# Altium PCB mini_bot_v1.PcbDoc
Units mil, origin at the board's own origin, x right, y up, seen from the top; angles counter-clockwise.
Board outline 6000 x 4000 mil, 4 copper layers (Top Layer 1, Layer 1, Layer 2, Bottom Layer 1), stack 23.756 mil thick; 41 components, 45 nets, 209 pads, 0 vias.
Unrouted connection lines stored in the file: 82.
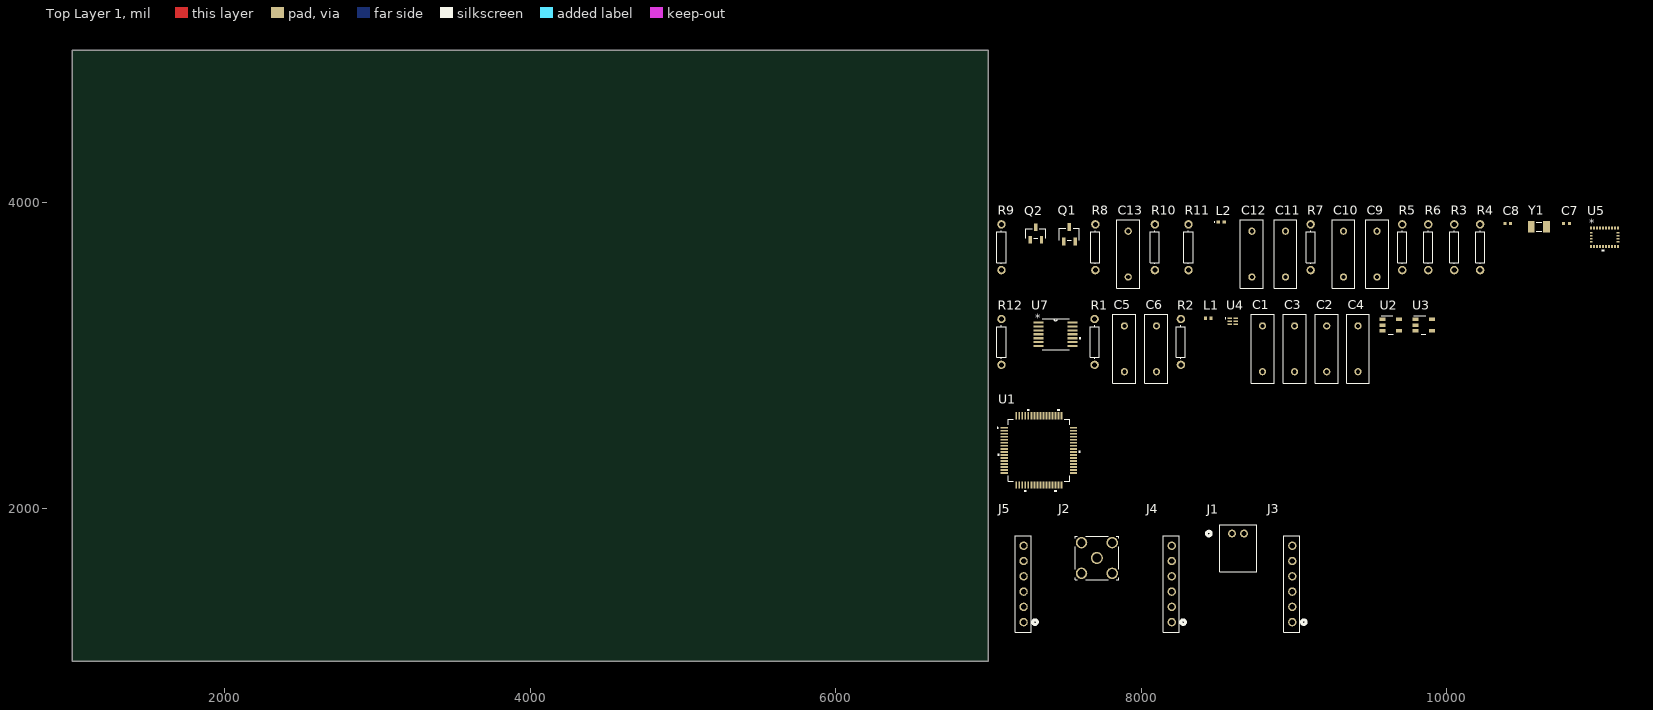
[diagram p0: Top Layer 1 view]
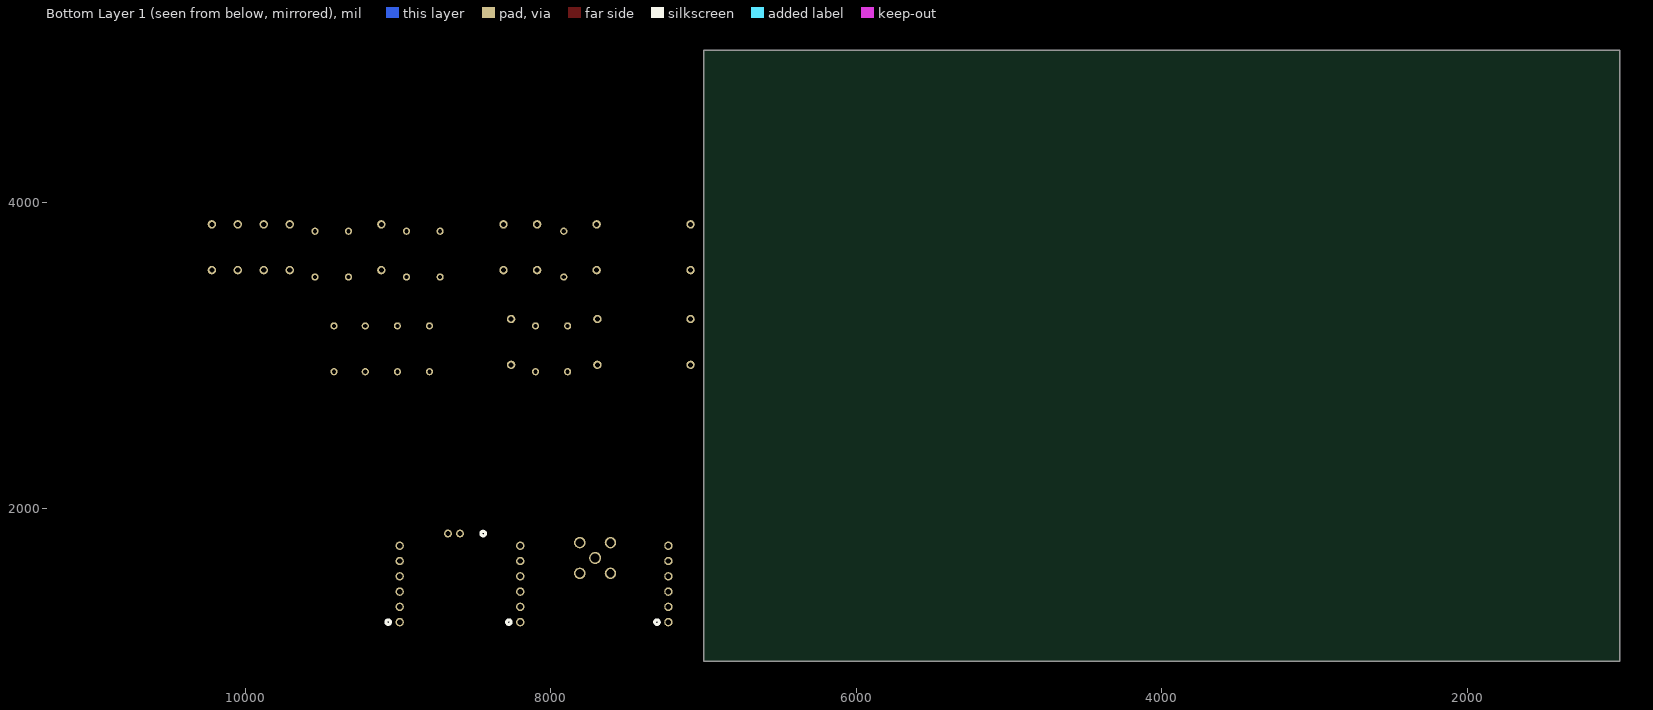
[diagram p1: Bottom Layer 1 view, seen from below]
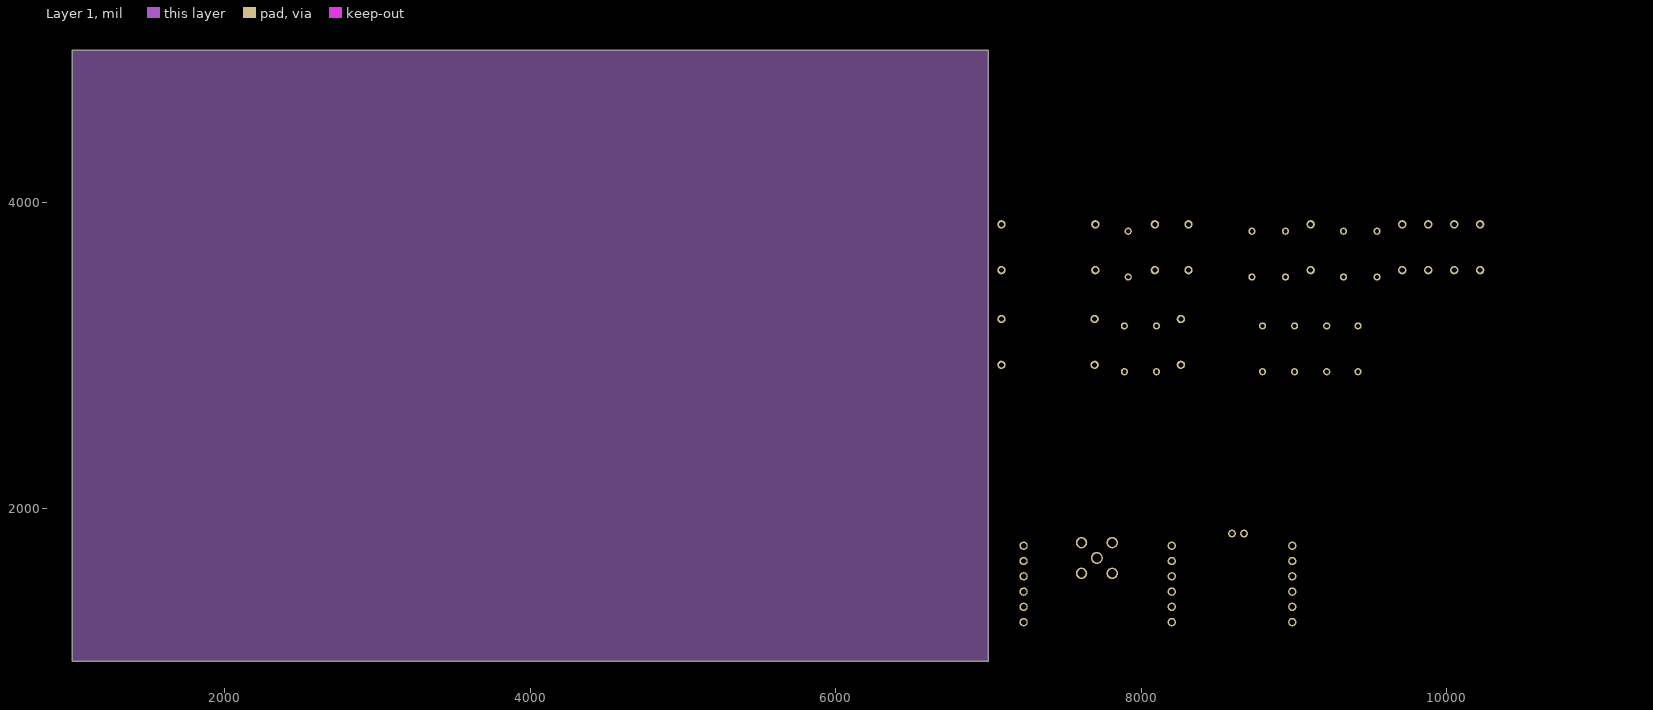
[diagram p2: Layer 1]
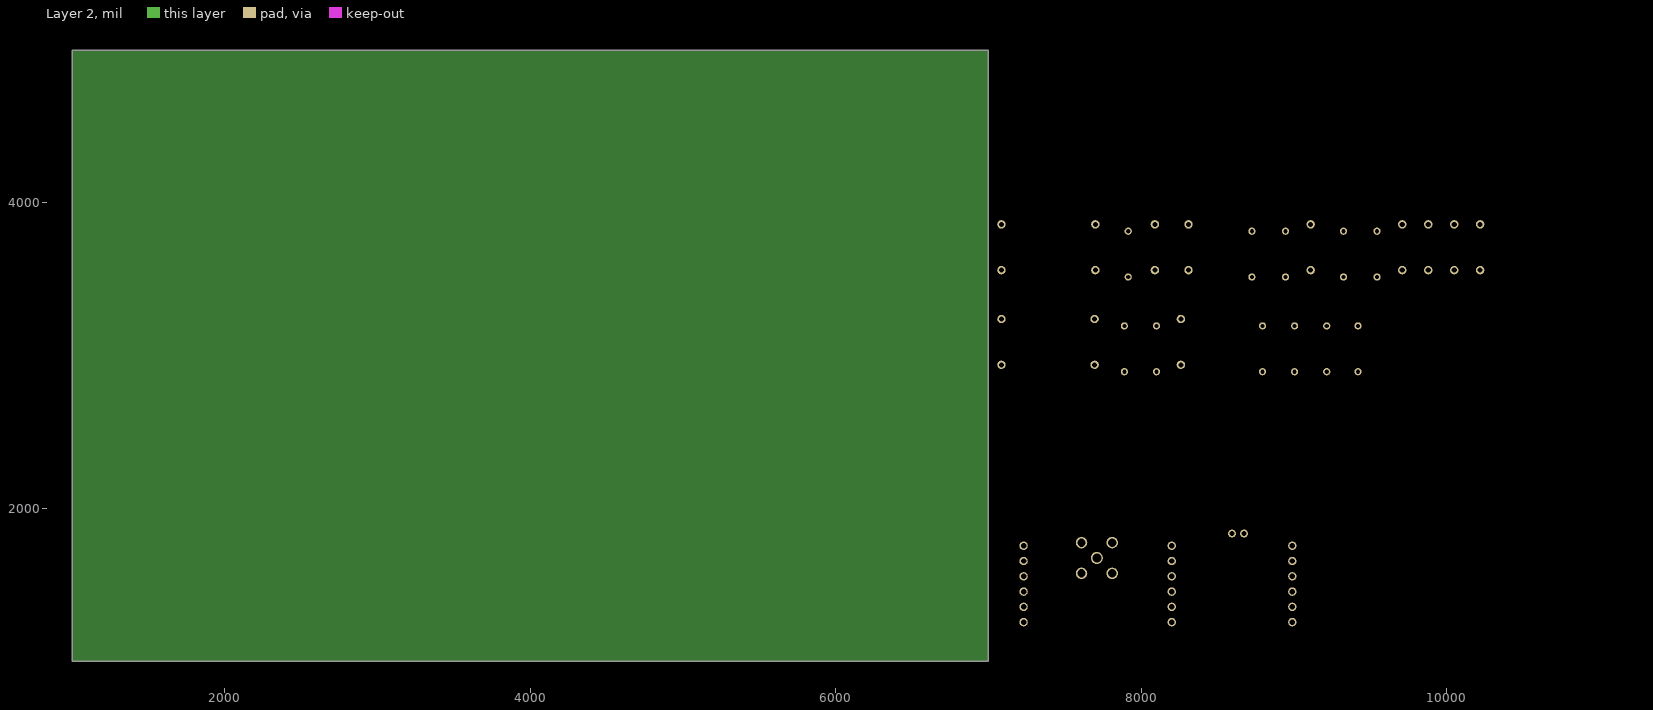
[diagram p3: Layer 2]

## Layer stack, top to bottom
Top Solder: solder mask 0.4, Solder Resist, Dk 3.5
Top Layer 1: signal copper 1.378
Dielectric 2: prepreg 2.8, PP-006, Dk 4.1
Layer 1: signal copper 1.4
Dielectric 1: dielectric 12.6, FR-4, Dk 4.8
Layer 2: signal copper 1.4
Dielectric 3: prepreg 2.8, PP-006, Dk 4.1
Bottom Layer 1: signal copper 1.378
Bottom Solder: solder mask 0.4, Solder Resist, Dk 3.5

## Board outline
1000,1000 7000,1000 7000,5000 1000,5000

## Design rules (kind name [scope] priority, off if disabled: settings)
Clearance [All] p1: gap=10 ignorepadtopadclearanceinfootprint=FALSE except(0: Arc-Hole Track-Hole SMDPad-Hole THPad-Hole Via-Hole Fill-Hole Poly-Hole Region-Hole Text-Hole)
PolygonConnect [All] p1: connectstyle=Relief reliefconductorwidth=10 reliefentries=4 polygonreliefangle="90 Angle" airgapwidth=10
RoomDefinition Sensor [InComponentClass('Sensor')] p1: confinementstyle=ConfineIn formatcopy=TRUE lockcomponents=FALSE outline 7045,3430 11165,3430 11165,4000 7045,4000
RoomDefinition Power [InComponentClass('Power')] p2: confinementstyle=ConfineIn formatcopy=TRUE lockcomponents=FALSE outline 7045,2810 9940,2810 9940,3380 7045,3380
RoomDefinition microController [InComponentClass('microController')] p3: confinementstyle=ConfineIn formatcopy=TRUE lockcomponents=FALSE outline 7045,2100 7610,2100 7610,2760 7045,2760
RoomDefinition Connectors [InComponentClass('Connectors')] p4: confinementstyle=ConfineIn formatcopy=TRUE lockcomponents=FALSE outline 7045,1065 9165,1065 9165,2045 7045,2045
RoutingVias [All] p1: holewidth=28 width=50 viastyle="Through Hole" minholewidth=28 minwidth=50 maxholewidth=28 maxwidth=50
SolderMaskExpansion [All] p1: expansion=4 istentingtop=FALSE
Width [All] p1: maxlimit=10 minlimit=10 preferedwidth=10
30 further rules are at their usual default settings.

## Classes and differential pairs
component class Sensor: U6

## Components (designator, comment, footprint, x,y, rotation, side; value= is the part's Value field where it differs from the comment)
C1 "Cap" RAD-0.3 8795,3045 r90 top value=100pF
C2 "Cap" RAD-0.3 9215,3045 r90 top value=100pF
C3 "Cap" RAD-0.3 9005,3045 r90 top value=100pF
C4 "Cap" RAD-0.3 9420,3045 r90 top value=100pF
C5 "Cap" RAD-0.3 7890,3045 r90 top value=100pF
C6 "Cap" RAD-0.3 8100,3045 r90 top value=100pF
C7 "CBR04C220F5GAC" CAPC10555_55N_KEM 10785,3865 r0 top
C8 "CBR04C220F5GAC" CAPC10555_55N_KEM 10400,3865 r0 top
C9 "Cap" RAD-0.3 9545,3665 r90 top value=100pF
C10 "Cap" RAD-0.3 9325,3665 r90 top value=100pF
C11 "Cap" RAD-0.3 8945,3665 r90 top value=100pF
C12 "Cap" RAD-0.3 8725,3665 r90 top value=27pF
C13 "Cap" RAD-0.3 7915,3665 r90 top value=25pF
J1 "S2B-PH-K-S(LF)(SN)" CONN_S2B-PH-K-S_JST 8595,1835 r0 top
J2 "RF2-04A-T-00-50-G" CONN_RF2-04A-T-00-50-G_ADM 7710,1675 r0 top
J3 "TSW-106-14-F-S" CON6_1X6_TU_TSW 8990,1505 r90 top
J4 "TSW-106-14-F-S" CON6_1X6_TU_TSW 8200,1505 r90 top
J5 "TSW-106-14-F-S" CON6_1X6_TU_TSW 7230,1505 r90 top
L1 "1239AS-H-1R0M=P2" CAPC10555_55N_KEM 8440,3245 r0 top
L2 "Inductor" 0402-A 8525,3875 r0 top value=35.5nH
Q1 "AO3407A" SOT-23-3L_AOS 7530,3795 r0 top
Q2 "MMBT3904LT1G" SOT-23_3L_ONS 7310,3800 r0 top
R1 "Res1" AXIAL-0.3 7695,3090 r90 top value=1K
R2 "Res1" AXIAL-0.3 8260,3090 r90 top value=1K
R3 "Res1" AXIAL-0.3 10050,3710 r90 top value=1K
R4 "Res1" AXIAL-0.3 10220,3710 r90 top value=1K
R5 "Res1" AXIAL-0.3 9710,3710 r90 top value=1K
R6 "Res1" AXIAL-0.3 9880,3710 r90 top value=1K
R7 "Res1" AXIAL-0.3 9110,3710 r90 top value=1K
R8 "Res1" AXIAL-0.3 7700,3710 r90 top value=2K
R9 "Res1" AXIAL-0.3 7085,3710 r90 top value=2.4K
R10 "Res1" AXIAL-0.3 8090,3710 r90 top value=1M
R11 "Res1" AXIAL-0.3 8310,3710 r90 top value=1M
R12 "Res1" AXIAL-0.3 7085,3090 r90 top value=1K
U1 "STM32F446RCT6TR" LQFP64-10x10mm 7330,2380 r0 top
U2 "LP2981-33DBVR" DBV0005A_N 9635,3200 r0 top
U3 "LP2981-33DBVR" DBV0005A_N 9850,3200 r0 top
U4 "MP2148GQD-33-Z" QFN-1p0x1p5_MNP 8600,3225 r0 top
U5 "BNO055" QFN_BNO055_BOS 11035,3775 r0 top
U7 "TXB0104PWR" PW14 7440,3140 r0 top
Y1 "ECS-.327-12.5-34B-C-TR" XTAL_ECS-.327-12.5-34B-C-TR 10605,3845 r0 top

## Footprints (in the part's own frame and the unit in brackets; to place one, negate y for a bottom-side part, rotate by r counter-clockwise, add the part's x,y. Pads: shape width x height; smd on the part's side, far side on the other; paste and mask are expansions set on the pad)
0402-A [mm] "Chip Inductor, Body 1.0x0.5mm, IPC High Density"
  rect 0.6x0.5 smd: 1(-0.5,0) 2(0.5,0)
  silkscreen extent -1.1,-0.15 -1.1,0.15, body extent -0.55,-0.3 0.55,0.3, height 0.55
AXIAL-0.3 [mm] "Axial Device, Thru-Hole; 2 Leads; 0.3 in Pin Spacing"
  round 1.4 hole 0.85: 1(-3.81,0) 2(3.81,0)
  silkscreen extent -2.77,-0.76 2.77,0.76
CAPC10555_55N_KEM [mm]
  rect 0.503x0.55 smd paste+0 mask+0: 1(-0.477,0) 2(0.477,0)
  body extent -0.53,-0.28 0.53,0.28, height 0.55
CON6_1X6_TU_TSW [mil]
  round 55 hole 35 mask+0: 1(-250,0) 2(-150,0) 3(-50,0) 4(50,0) 5(150,0) 6(250,0)
  silkscreen extent -315,-90 315,55, body extent -300,-50 300,50, height 500
CONN_RF2-04A-T-00-50-G_ADM [mil]
  round 79 hole 59: 1(0,0)
  round 75 hole 55 mask+0: 2(-100.5,100.5) 3(-100.5,-100.5) 4(100.5,-100.5) 5(100.5,100.5)
  silkscreen extent -143,-143 143,143, body extent 0,0 10,10, height 10
CONN_S2B-PH-K-S_JST [mil]
  round 52 hole 32 mask+0: 1(0,0) 2(78.74,0)
  silkscreen extent -167,-251 160,58, body extent 0,0 10,10, height 10
DBV0005A_N [mm]
  rect 1x0.6 smd paste+0 mask+0.051: 1(-1.375,0.95) 2(-1.375,0) 3(-1.375,-0.95) 4(1.375,-0.95) 5(1.375,0.95)
  silkscreen extent -1.63,-1.55 0.38,1.55, body extent 0,0 0.25,0.25, height 0.25
LQFP64-10x10mm [mil]
  rect 47x12 smd paste+0 mask+0: 1(-226.38,147.64) 2(-226.38,127.95) 3(-226.38,108.27) 4(-226.38,88.58) 5(-226.38,68.9) 6(-226.38,49.21) 7(-226.38,29.53) 8(-226.38,9.84) 9(-226.38,-9.84) 10(-226.38,-29.53) 11(-226.38,-49.21) 12(-226.38,-68.9) 13(-226.38,-88.58) 14(-226.38,-108.27) 15(-226.38,-127.95) 16(-226.38,-147.64) 33(226.38,-147.64) 34(226.38,-127.95) 35(226.38,-108.27) 36(226.38,-88.58) 37(226.38,-68.9) 38(226.38,-49.21) 39(226.38,-29.53) 40(226.38,-9.84) 41(226.38,9.84) 42(226.38,29.53) 43(226.38,49.21) 44(226.38,68.9) 45(226.38,88.58) 46(226.38,108.27) 47(226.38,127.95) 48(226.38,147.64)
  rect 12x47 smd paste+0 mask+0: 17(-147.64,-226.38) 18(-127.95,-226.38) 19(-108.27,-226.38) 20(-88.58,-226.38) 21(-68.9,-226.38) 22(-49.21,-226.38) 23(-29.53,-226.38) 24(-9.84,-226.38) 25(9.84,-226.38) 26(29.53,-226.38) 27(49.21,-226.38) 28(68.9,-226.38) 29(88.58,-226.38) 30(108.27,-226.38) 31(127.95,-226.38) 32(147.64,-226.38) 49(147.64,226.38) 50(127.95,226.38) 51(108.27,226.38) 52(88.58,226.38) 53(68.9,226.38) 54(49.21,226.38) 55(29.53,226.38) 56(9.84,226.38) 57(-9.84,226.38) 58(-29.53,226.38) 59(-49.21,226.38) 60(-68.9,226.38) 61(-88.58,226.38) 62(-108.27,226.38) 63(-127.95,226.38) 64(-147.64,226.38)
  silkscreen extent -273,-270 270,270, body extent -236,-236 236,236, height 63
PW14 [mil]
  rect 66x14 smd: 1(-111,76.77) 2(-111,51.18) 3(-111,25.59) 4(-111,0) 5(-111,-25.59) 6(-111,-51.18) 7(-111,-76.77) 8(111,-76.77) 9(111,-51.18) 10(111,-25.59) 11(111,0) 12(111,25.59) 13(111,51.18) 14(111,76.77)
  silkscreen extent -88,-100 164,100, body extent -130,-101 130,101, height 47
QFN-1p0x1p5_MNP [mil]
  rect 28x10 smd paste-5 mask+0: 1(-19.5,19.68) 2(-19.5,0) 3(-19.5,-19.68) 4(19.5,-19.68) 5(19.5,0) 6(19.5,19.68)
  silkscreen extent -50,17 -47,23, body extent -21,-31 21,31, height 37
QFN_BNO055_BOS [mil]
  rect 12x21 smd paste+0 mask+0: 1(-88.58,60.5) 6(-88.58,-60.5) 7(-68.9,-60.5) 8(-49.21,-60.5) 9(-29.53,-60.5) 10(-9.84,-60.5) 11(9.84,-60.5) 12(29.53,-60.5) 13(49.21,-60.5) 14(68.9,-60.5) 15(88.58,-60.5) 20(88.58,60.5) 21(68.9,60.5) 22(49.21,60.5) 23(29.53,60.5) 24(9.84,60.5) 25(-9.84,60.5) 26(-29.53,60.5) 27(-49.21,60.5) 28(-68.9,60.5)
  rect 17x12 smd: 2(-88,29.53) 3(-88,9.84) 4(-88,-9.84) 5(-88,-29.53) 16(88,-29.53) 17(88,-9.84) 18(88,9.84) 19(88,29.53)
  silkscreen extent -17,-91 -2,-81, body extent 0,0 10,10, height 10
RAD-0.3 [mm] "Radial Cap, Thru-Hole; 2 Leads; 0.3 in Pin Spacing"
  round 1.2 hole 0.7: 1(-3.81,0) 2(3.81,0)
  silkscreen extent -5.71,-1.91 5.71,1.91
SOT-23-3L_AOS [mil]
  rect 22x52 smd paste+0 mask+0: 1(-37.5,-47) 2(37.5,-47) 3(0,47)
  silkscreen extent -66,-40 66,40, body extent -61,-59 61,59, height 49
SOT-23_3L_ONS [mil]
  rect 22x50 smd paste+0 mask+0: 1(-37.5,-41) 2(37.5,-41) 3(0,41)
  silkscreen extent -65,-32 65,32, body extent -60,-52 60,52, height 44
XTAL_ECS-.327-12.5-34B-C-TR [mm]
  rect 1.1x1.9 smd: 1(-1.25,0) 2(1.25,0)
  silkscreen extent -0.44,-0.75 0.44,0.75

## Part data
C1 C2 C3 C4 C5 C6 C9 C10 C11 C12 C13: "Capacitor", LatestRevisionDate=17-Jul-2002, LatestRevisionNote="Re-released for DXP Platform.", PackageDescription="Radial Cap, Thru-Hole; 2 Leads; 0.3 in Pin Spacing", PackageReference=RAD-0.3, Published=8-Jun-2000, Publisher="Altium Limited"
C7 C8: "No Description Available", Mfr_Name=Kemet, Copyright="Copyright (C) 2023 Ultra Librarian. All rights reserved.", Digi-Key_Part_Number_1=399-8827-1-ND, Digi-Key_Part_Number_2=399-8827-2-ND, Digi-Key_Part_Number_3=399-8827-6-ND, Manufacturer_Part_Number=CBR04C220F5GAC, RefDes=RefDes, Type=DEV
J1: "No Description Available", Mfr_Name=JST, Copyright="Copyright (C) 2023 Ultra Librarian. All rights reserved.", Digi-Key_Part_Number_1=455-1719-ND, Digi-Key_Part_Number_2=455-1719-NDL, Manufacturer_Part_Number=S2B-PH-K-S(LF)(SN), RefDes=RefDes, Type=DEV
J2: "No Description Available", Mfr_Name="ADAM TECHNOLOGIES INC", Copyright="Copyright (C) 2023 Ultra Librarian. All rights reserved.", Digi-Key_Part_Number_1=2057-RF2-04A-T-00-50-G-ND, Manufacturer_Part_Number=RF2-04A-T-00-50-G, RefDes=RefDes, Type=DEV
J3 J4 J5: "No Description Available", Mfr_Name="Samtec Inc", Copyright="Copyright (C) 2023 Ultra Librarian. All rights reserved.", Digi-Key_Part_Number_1=SAM15379-ND, Digi-Key_Part_Number_2=TSW-106-14-F-S-ND, Manufacturer_Part_Number=TSW-106-14-F-S, RefDes=RefDes, Type=DEV
L1: "Inductor with Inductance: 1uH Tol. +/-20%, Package: 1008 _2520_", Package="2520 Murata", Digi-Key_Part_Number=490-10564-1-ND, Digi-Key_Purchase_URL=https://www.digikey.com.au/product-detail/en/murata-electronics/1239AS-H-1R0M=P2/490-10564-1-ND/5272022?utm_source=snapeda&utm_medium=aggregator&utm_campaign=symbol, MF="Murata Electronics", MP=1239AS-H-1R0M=P2, SnapEDA_Link=https://www.snapeda.com/parts/1239AS-H-1R0M%3DP2/Murata%20Electronics%20North%20America/view-part/581165/?ref=snap
Q1: "No Description Available", Mfr_Name="Alpha and Omega Semiconductor", Copyright="Copyright (C) 2023 Ultra Librarian. All rights reserved.", Digi-Key_Part_Number_1=785-1006-2-ND, Digi-Key_Part_Number_2=785-1006-1-ND, Digi-Key_Part_Number_3=785-1006-6-ND, Digi-Key_Part_Number_4=785-1006-2-NDL, Manufacturer_Part_Number=AO3407A, RefDes=RefDes, Type=DEV
Q2: "No Description Available", Mfr_Name=onsemi, Copyright="Copyright (C) 2023 Ultra Librarian. All rights reserved.", Digi-Key_Part_Number_1=2156-MMBT3904LT1G-OS-ND, Digi-Key_Part_Number_3=MMBT3904LT1GOSCT-ND, Digi-Key_Part_Number_4=MMBT3904LT1GOSDKR-ND, Digi-Key_Part_Number_5=MMBT3904LT1GOSTR-ND, Manufacturer_Part_Number=MMBT3904LT1G, RefDes=RefDes, Type=DEV
R1 R2 R3 R4 R5 R6 R7 R8 R9 R10 R11 R12: "Resistor", LatestRevisionDate=17-Jul-2002, LatestRevisionNote="Re-released for DXP Platform.", PackageDescription="Axial Device, Thru-Hole; 2 Leads; 0.3 in Pin Spacing", PackageReference=AXIAL-0.3, Published=8-Jun-2000, Publisher="Altium Limited"
U1: "No Description Available", Mfr_Name=STMicroelectronics, Copyright="Copyright (C) 2023 Ultra Librarian. All rights reserved.", Digi-Key_Part_Number_1=497-19357-2-ND, Digi-Key_Part_Number_2=497-19357-1-ND, Digi-Key_Part_Number_3=497-19357-6-ND, Manufacturer_Part_Number=STM32F446RCT6TR, RefDes=RefDes, Type=DEV
U2 U3 U7: "No Description Available", Mfr_Name="Texas Instruments", Copyright="Copyright (C) 2023 Ultra Librarian. All rights reserved.", RefDes=RefDes, Type=DEV
  U2 U3: Digi-Key_Part_Number_1=296-17360-1-ND, Digi-Key_Part_Number_2=296-17360-2-ND, Digi-Key_Part_Number_3=296-17360-6-ND, Digi-Key_Part_Number_4=2156-LP2981-33DBVR-ND, Manufacturer_Part_Number=LP2981-33DBVR
  U7: Digi-Key_Part_Number_1=296-21929-1-ND, Digi-Key_Part_Number_2=296-21929-2-ND, Digi-Key_Part_Number_3=296-21929-6-ND, Manufacturer_Part_Number=TXB0104PWR
U4: "No Description Available", Mfr_Name="Monolithic Power Systems", Copyright="Copyright (C) 2023 Ultra Librarian. All rights reserved.", Digi-Key_Part_Number_1=MP2148GQD-33-Z-ND, Manufacturer_Part_Number=MP2148GQD-33-Z, RefDes=RefDes, Type=DEV
U5: "No Description Available", Mfr_Name="Bosch Sensortec", Copyright="Copyright (C) 2023 Ultra Librarian. All rights reserved.", Digi-Key_Part_Number_1=828-1058-1-ND, Digi-Key_Part_Number_2=828-1058-2-ND, Digi-Key_Part_Number_3=828-1058-6-ND, Manufacturer_Part_Number=BNO055, RefDes=RefDes, Type=DEV
Y1: "32.768kHz Â±10ppm Crystal 12.5pF 70 kOhms 2-SMD, No Lead", Package="SMD-2 ECS International", Digi-Key_Part_Number=XC1968CT-ND, DigiKey-Purchase-URL=https://snapeda.com/shop?store=DigiKey&id=55051, MF="ECS Inc.", MP=ECS-.327-12.5-34B-C-TR, SnapEDA_Link=https://www.snapeda.com/parts/ECS-.327-12.5-34B-C-TR/ECS%20Inc./view-part/55051/?ref=snap
L2: Code_IEC=1005, Code_JEITA=0402, LatestRevisionDate=29-May-2009, LatestRevisionNote="IPC-7351 Footprint Added.", PackageDescription="Chip Inductor", PackageReference=0402-A, Published=8-Jun-2000, Publisher="Altium Limited"

## Nets (pads, with @x,y where several pads share a name; then routed paths per layer and width w, separated by ;. In a path a pad name is that pad's centre, name@x,y a point inside that pad or via, vN(x,y) a via of type N, cw(c..) or ccw(c..) an arc to the next point about the centre after c; other vN are vias at no path point)
1PPS: 
3V3: C6.2 C9.2 L1.2 U4.6 U7.1
3V3_GPS: C2.2 U2.5
5V: C1.2 C3.2 C5.2 J1.1 J3.4 J4.4 J5.2 R1.2 R2.1 U2.1 U2.3 U3.1 U3.3 U4.3 U7.14
12VIN: J3.1 J4.1
ADDR_SEL_IMU: U5.17
ANT: C12.1 J2.1 L2.2
ANT-SC-N: 
BOOT_LOADER: C4.2 R3.1 R4.1 R5.2 R6.2 U3.5 U5.3 U5.28
ENC_1_A_5V: J3.5
ENC_1_B_5V: J3.6
ENC_2_A_5V: J4.5
ENC_2_B_5V: J4.6
FORCE-ON-N: 
GND: C1.1 C2.1 C3.1 C4.1 C5.1 C6.1 C7.2 C8.2 C9.1 C11.1 C13.1 J1.2 J3.3 J4.3 J5.1 Q2.2 R7.1 R9.1 R10.1 R12.1 U2.2 U3.2 U4.2 U5.2 U5.5 U5.6 U5.25
GNDIO: C10.1
INT_IMU: U5.14
MOTOR_GND: J3.2 J4.2
MOTOR_IN1: J5.3 U7.13
MOTOR_IN2: J5.4 U7.12
MOTOR_IN3: J5.5 U7.11
MOTOR_IN4: J5.6 U7.10
NetC7_1: C7.1 U5.27 Y1.2
NetC8_1: C8.1 U5.26 Y1.1
NetC11_2: C11.2 U5.1
NetC12_2: C12.2
NetC13_2: C13.2 L2.1 Q1.3 R10.2
NetL1_1: L1.1 U4.4
NetQ1_1: Q1.1 Q2.3 R11.1
NetQ1_2: Q1.2 R11.2
NetQ2_1: Q2.1 R8.1 R9.2
NetR3_2: R3.2 U5.4
NetR4_2: R4.2 U5.11
NetR7_2: R7.2 U5.18
NetR8_2: R8.2
NetR12_2: R12.2 U7.8
PG: R2.2 U4.1
RX_GPS: 
SCL_IMU: R5.1 U5.19
SDA_IMU: R6.1 U5.20
SW_REG_EN: R1.1 U4.5
SWCLK: U5.8
SWDIO: U5.7
TX_GPS: 
VDDIO: C10.2
pads on no net: J2.2 J2.3 J2.4 J2.5 U1.1 U1.2 U1.3 U1.4 U1.5 U1.6 U1.7 U1.8 U1.9 U1.10 U1.11 U1.12 U1.13 U1.14 U1.15 U1.16 U1.17 U1.18 U1.19 U1.20 U1.21 U1.22 U1.23 U1.24 U1.25 U1.26 U1.27 U1.28 U1.29 U1.30 U1.31 U1.32 U1.33 U1.34 U1.35 U1.36 U1.37 U1.38 U1.39 U1.40 U1.41 U1.42 U1.43 U1.44 U1.45 U1.46 U1.47 U1.48 U1.49 U1.50 U1.51 U1.52 U1.53 U1.54 U1.55 U1.56 U1.57 U1.58 U1.59 U1.60 U1.61 U1.62 U1.63 U1.64 U2.4 U3.4 U5.9 U5.10 U5.12 U5.13 U5.15 U5.16 U5.21 U5.22 U5.23 U5.24 U7.2 U7.3 U7.4 U7.5 U7.6 U7.7 U7.9

## Polygon pours and split planes (outlines as drawn)
GND on Layer 1 "GND_L02_P001" (solid, pour order 1): 1002.6,4997.94 1002.6,997.94 7002.6,997.94 7002.6,4997.94
3V3 on Layer 2 "3V3_L03_P000" (solid, pour order 0): 1000,5000 1000,1000 7000,1000 7000,5000

## Text inside footprints (layer, text, board x,y; h text height)
U5: Top Overlay "*" at 10933.92,3846 h50; Mechanical 13 "*" at 10933.92,3800 h50
U7: Top Overlay "*" at 7306.5,3225.77 h50; Mechanical 13 "*" at 7306.5,3225.77 h50